# EAGLE board ctrlr_rev2 (EAGLE 8.7.1)
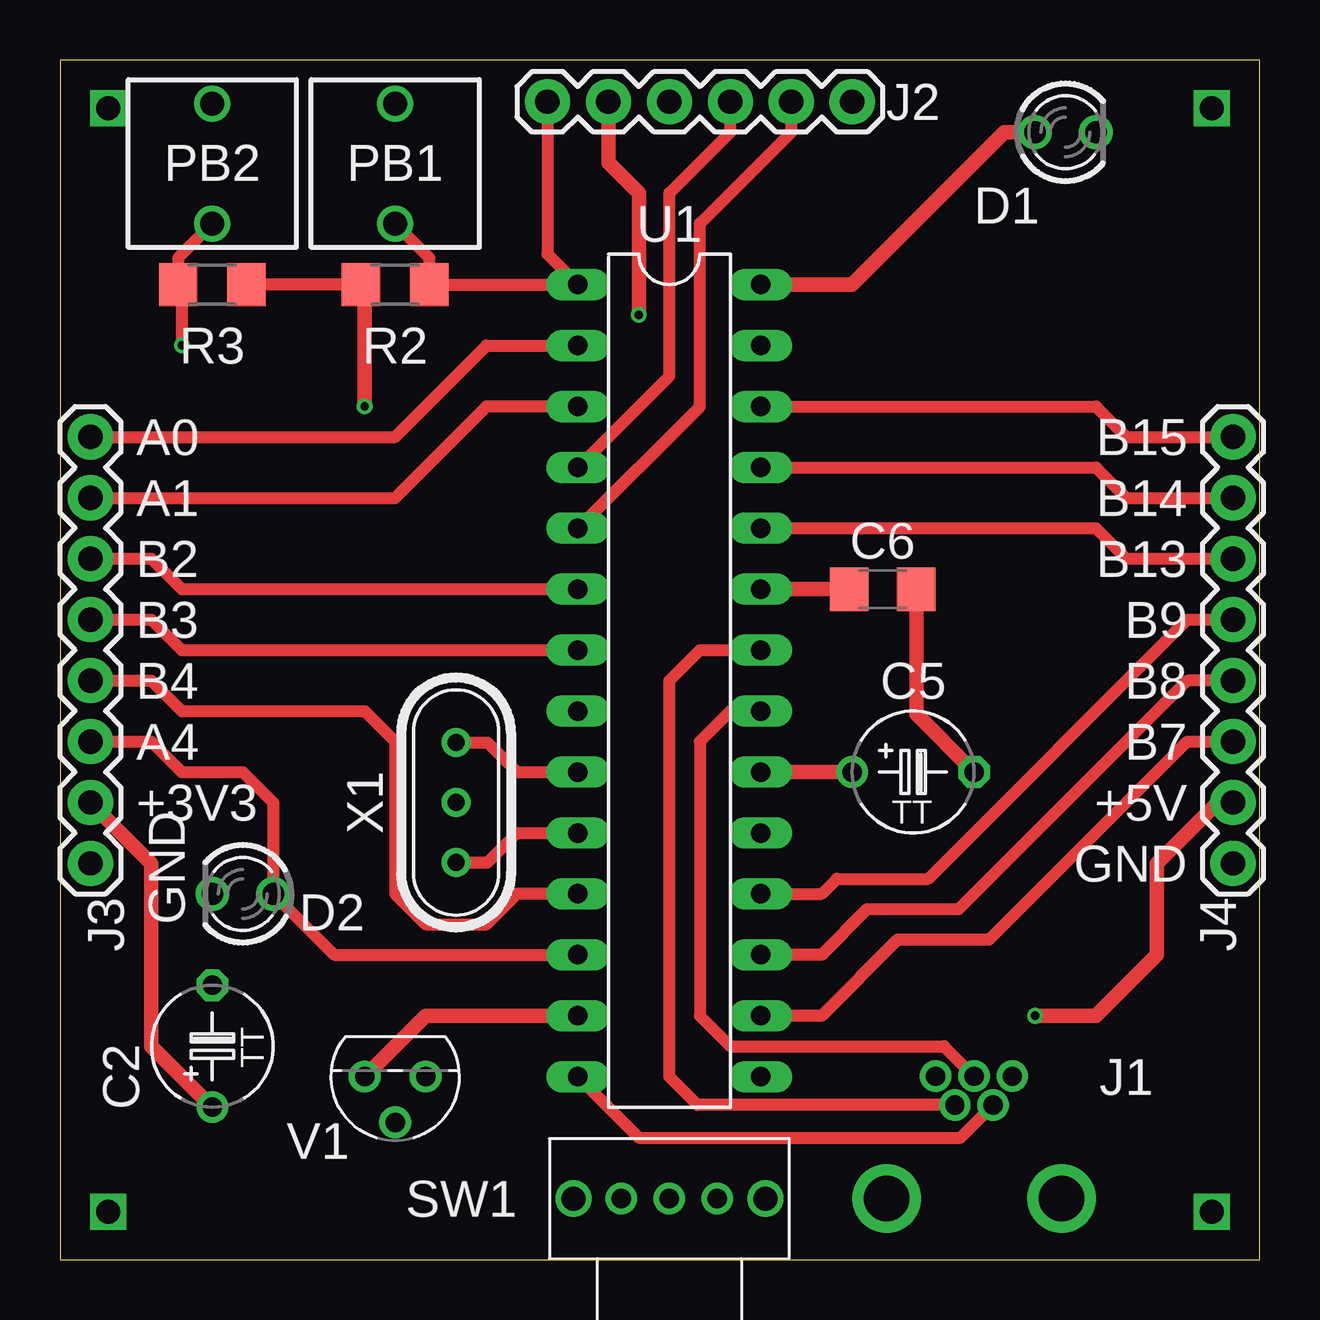
[diagram p0: board, top side]
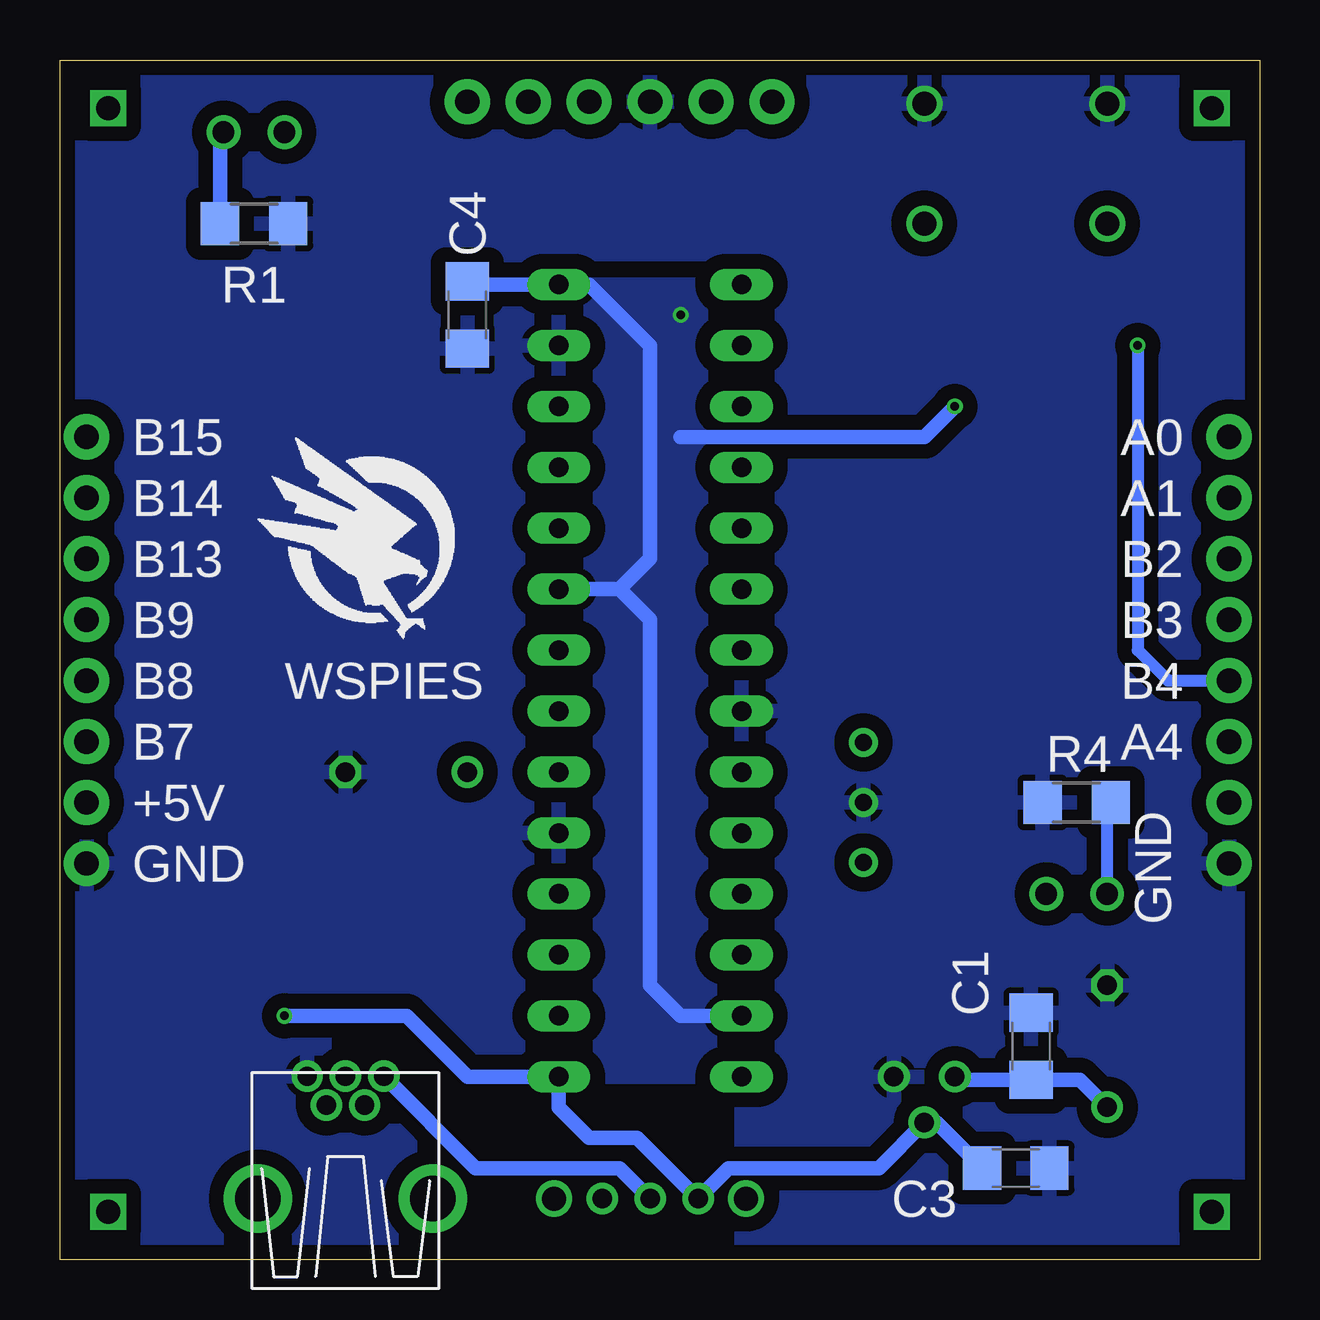
[diagram p1: board, bottom side, seen from below]

Size 50 x 50 mm. Coordinates in mm from the lower left corner, seen from the top.
Outline: 0,0 50,0 50,50 0,50 0,0
Copper layers (1*16): Top 0.035mm / dielectric 1.5mm / Bottom 0.035mm
Design rules "SeeedStudio_2layer_DRU_no_angle_20140221": minimum track width 6mil, minimum drill 12mil, track to track 6mil, track to pad 6mil, pad to pad 6mil, via to via 6mil, smd to smd 0mil, copper to edge 10mil, drill to drill 10mil, minimum pad ring 10mil, minimum via ring 6mil, stop-mask expansion 2mil, vias tented up to drill 100mil, thermal gap 10mil

## Footprints (pad centres in the part's own frame; a part is rotated, then mirrored left to right if it is on the bottom)
C1206 = smd 1.6 x 1.8: 1 -1.4,0; 2 1.4,0
TAP5-50 = drill 0.813: + -2.54,0 | drill 0.813 octagon: - 2.54,0
LED-3MM-V = drill 0.9: A -1.27,0; K 1.27,0
USB-MB-TO = drill 0.8: D+ 5.1,0; D- 3.9,0.8; GND 5.1,-1.6; ID 3.9,-0.8; VBUS 5.1,1.6 | drill 1.9: P$6 0,-3.65; P$7 0,3.65
CONN_1X06 = drill 1.016 pad 1.88: 1 0,0; 2 2.54,0; 3 5.08,0; 4 7.62,0; 5 10.16,0; 6 12.7,0
CONN_1X08 = drill 1.016 pad 1.88: 1 0,0; 2 2.54,0; 3 5.08,0; 4 7.62,0; 5 10.16,0; 6 12.7,0; 7 15.24,0; 8 17.78,0
PCPIN-2 = drill 1: 1 0,0; 2 5,0
R1206 = smd 1.6 x 1.803: 1 -1.422,0; 2 1.422,0
PCPIN-3SS = drill 0.8: 1 -2,0; 2 0,0; 3 2,0 | drill 1: A1 -4,0; A2 4,0
DIP28-3 = drill 0.813 long: 1 -16.51,-3.81; 2 -13.97,-3.81; 3 -11.43,-3.81; 4 -8.89,-3.81; 5 -6.35,-3.81; 6 -3.81,-3.81; 7 -1.27,-3.81; 8 1.27,-3.81; 9 3.81,-3.81; 10 6.35,-3.81; 11 8.89,-3.81; 12 11.43,-3.81; 13 13.97,-3.81; 14 16.51,-3.81; 15 16.51,3.81; 16 13.97,3.81; 17 11.43,3.81; 18 8.89,3.81; 19 6.35,3.81; 20 3.81,3.81; 21 1.27,3.81; 22 -1.27,3.81; 23 -3.81,3.81; 24 -6.35,3.81; 25 -8.89,3.81; 26 -11.43,3.81; 27 -13.97,3.81; 28 -16.51,3.81
TO-92 = drill 0.813: 1 -1.27,0; 2 0,1.905; 3 1.27,0
RAD-3-2.5 = drill 0.7 pad 1.2: 1 -2.5,0; 2 0,0; 3 2.5,0

## Placement (x,y rotation side)
C1  0.1uF  [C1206]  9.53,8.89 90 bottom
C2  10uF  [TAP5-50]  6.35,8.89 90 top
C3  0.1uF  [C1206]  10.16,3.81 0 bottom
C4  0.1uF  [C1206]  33.02,39.37 270 bottom
C5  10uF  [TAP5-50]  35.56,20.32 0 top
C6  0.1uF  [C1206]  34.29,27.94 0 top
D1  LED-RED  [LED-3MM-V]  41.91,46.99 0 top
D2  LED-GREEN  [LED-3MM-V]  7.62,15.24 180 top
J1  USB-MINI-B  [USB-MB-TO]  38.1,2.54 90 top
J2  HEADER-6  [CONN_1X06]  20.32,48.26 0 top
J3  HEADER-8  [CONN_1X08]  1.27,16.51 90 top
J4  HEADER-8  [CONN_1X08]  48.9,16.51 90 top
PB1  EVQ-11A07K  [PCPIN-2]  13.97,43.18 90 top
PB2  EVQ-11A07K  [PCPIN-2]  6.35,43.18 90 top
R1  330  [R1206]  41.91,43.18 180 bottom
R2  10.0k  [R1206]  13.97,40.64 180 top
R3  10.0k  [R1206]  6.35,40.64 0 top
R4  330  [R1206]  7.62,19.05 0 bottom
SW1  1825232-1  [PCPIN-3SS]  25.4,2.54 0 top
U1  PIC32MX250F128B  [DIP28-3]  25.4,24.13 270 top
V1  MCP1702  [TO-92]  13.97,7.62 180 top
X1  CSTLS8M00G53  [RAD-3-2.5]  16.51,19.05 270 top

## Library data of the parts
C1-C6 = rcl; SPICEPREFIX: C
D1 = me433; COLOR: RED
D2 = me433; COLOR: GREEN
J1-J4 PB1 PB2 SW1 U1 V1 X1 = me433
R1-R4 = rcl; SPICEPREFIX: R

## Nets
+3V3: C1.1 C2.+ C4.1 C6.1 D1.A J2.2 J3.2 R2.2 R3.2 U1.13 U1.23 U1.28 V1.3
+5V: C3.1 J4.2 SW1.1 U1.15 V1.2
A0: J3.8 U1.2
A1: J3.7 U1.3
A4: D2.A J3.3 U1.12
B2: J3.6 U1.6
B3: J3.5 U1.7
B4: J3.4 PB2.1 R3.1 U1.11
B7: J4.3 U1.16
B8: J4.4 U1.17
B9: J4.5 U1.18
B13: J4.6 U1.24
B14: J4.7 U1.25
B15: J4.8 U1.26
D+: J1.D+ U1.21
D-: J1.D- U1.22
GND: C1.2 C2.- C3.2 C4.2 C5.- C6.2 J1.GND J2.3 J3.1 J4.1 PB1.2 PB2.2 R1.1 R4.1 U1.8 U1.19 U1.27 V1.1 X1.2
MCLR: J2.1 PB1.1 R2.1 U1.1
N$1: D2.K R4.2
N$4: D1.K R1.2
N$5: J1.VBUS SW1.2
N$6: C5.+ U1.20
OSC1: U1.9 X1.1
OSC2: U1.10 X1.3
PGC: J2.5 U1.5
PGD: J2.4 U1.4
USBID: J1.ID U1.14

## Tracks (layer width: path | path; a pad name or v marks a point on that pad's centre or on a via)
+3V3  (via drill 0.35)
  Top 0.508: R2.2 R3.2
  Top 0.61: J2.2 22.86,45.72 24.13,44.45 v24.13,39.37 | V1.3 15.24,10.16 U1.13 | J3.2 3.81,16.51 3.81,8.89 C2.+ | U1.23 C6.1 | U1.28 33.02,40.64 39.37,46.99 D1.A | R2.2 12.7,40.49 v12.7,35.56
  Bottom 0.61: C2.+ 7.49,7.49 C1.1 12.57,7.49 V1.3 | C4.1 32.89,40.64 U1.28 27.94,40.64 25.4,38.1 25.4,29.21 26.67,27.94 | U1.23 26.67,27.94 | U1.13 24.13,10.16 25.4,11.43 25.4,26.67 26.67,27.94 | v12.7,35.56 13.97,34.29 24.13,34.29
  pour Bottom (isolate 0.61): 22.86,40.64 22.86,7.62 27.94,7.62 27.94,40.64
+5V  (via drill 0.35)
  Top 0.61: v40.64,10.16 43.18,10.16 45.72,12.7 45.72,16.51 48.26,19.05 J4.2
  Bottom 0.61: C3.1 13.46,5.71 V1.2 15.88,3.81 22.13,3.81 SW1.1 25.94,5.08 27.94,5.08 29.21,6.35 U1.15 33.02,7.62 35.56,10.16 v40.64,10.16
A0
  Top 0.508: U1.2 17.78,38.1 13.97,34.29 J3.8
A1
  Top 0.508: J3.7 13.97,31.75 17.78,35.56 U1.3
A4
  Top 0.508: J3.3 3.81,21.59 5.08,20.32 7.62,20.32 8.89,19.05 D2.A 11.43,12.7 U1.12
B2
  Top 0.508: J3.6 3.81,29.21 5.08,27.94 U1.6
B3
  Top 0.508: J3.5 3.81,26.67 5.08,25.4 U1.7
B4  (via drill 0.35)
  Top 0.508: U1.11 19.05,15.24 17.78,13.97 15.24,13.97 13.97,15.24 13.97,21.59 12.7,22.86 5.08,22.86 3.81,24.13 J3.4 | PB2.1 4.93,41.76 R3.1 5.08,40.49 v5.08,38.1
  Bottom 0.508: v5.08,38.1 5.08,25.4 3.81,24.13 J3.4
B7
  Top 0.508: U1.16 31.75,10.16 34.92,13.34 38.73,13.34 46.99,21.59 48.26,21.59 48.73,21.59 J4.3
B8
  Top 0.508: U1.17 31.75,12.7 33.66,14.61 37.47,14.61 46.99,24.13 J4.4
B9
  Top 0.508: U1.18 31.75,15.24 32.38,15.88 36.2,15.88 46.99,26.67 48.26,26.67 48.73,26.67 J4.5
B13
  Top 0.508: U1.24 43.18,30.48 44.45,29.21 48.26,29.21 48.73,29.21 J4.6
B14
  Top 0.508: U1.25 43.18,33.02 44.45,31.75 48.26,31.75 48.73,31.75 J4.7
B15
  Top 0.508: U1.26 43.18,35.56 44.45,34.29 48.26,34.29 48.73,34.29 J4.8
D+
  Top 0.508: U1.21 27.94,22.86 26.67,21.59 26.67,10.16 27.94,8.89 36.85,8.89 J1.D+
D-
  Top 0.508: U1.22 26.67,25.4 25.4,24.13 25.4,7.62 26.58,6.44 J1.D-
GND
  Top 0.61: C6.2 35.69,22.73 C5.-
  pour Bottom (isolate 0.61): -2.54,53.34 -2.54,-2.54 21.59,-2.54 21.59,53.34
  pour Bottom (isolate 0.61): 29.21,53.34 29.21,-2.54 53.34,-2.54 53.34,53.34
  pour Bottom (isolate 0.61): 17.78,53.34 17.78,41.91 33.02,41.91 33.02,53.34
MCLR
  Top 0.508: J2.1 20.32,41.91 U1.1 R2.1 15.39,41.76 PB1.1
N$1
  Bottom 0.508: D2.K 6.35,18.9 R4.2
N$4
  Bottom 0.61: D1.K 43.33,46.84 R1.2
N$5
  Bottom 0.61: SW1.2 26.67,3.81 32.67,3.81 J1.VBUS
N$6
  Top 0.61: U1.20 C5.+
OSC1
  Top 0.508: X1.1 17.82,21.55 19.05,20.32 U1.9
OSC2
  Top 0.508: X1.3 17.82,16.55 19.05,17.78 U1.10
PGC
  Top 0.508: U1.5 26.67,35.56 26.67,43.18 30.48,46.99 J2.5
PGD
  Top 0.508: U1.4 25.4,36.83 25.4,44.45 27.94,46.99 J2.4
S$1  (via drill 1)
  other vias: 2,48
S$2  (via drill 1)
  other vias: 48,48
S$3  (via drill 1)
  other vias: 48,2
S$4  (via drill 1)
  other vias: 2,2
USBID
  Top 0.508: U1.14 24.13,5.08 37.54,5.08 J1.ID

## Text on the board
tPlace: A0 | B15 | A1 | B14 | B2 | B13 | B3 | B9 | B4 | B8 | A4 | B7 | +3V3 | +5V | GND | GND
bPlace: A0 | B15 | A1 | B14 | B2 | B13 | B3 | B9 | B4 | WSPIES | B8 | A4 | B7 | +5V | GND | GND